# Altium PCB Microcontroller_PCB.PcbDoc
Units mm, origin at the board's own origin, x right, y up, seen from the top; angles counter-clockwise.
Board outline 73.8 x 52.5 mm, 2 copper layers (Top Layer, Bottom Layer); 48 components, 46 nets, 212 pads, 10 vias.
Unrouted connection lines stored in the file: 98.
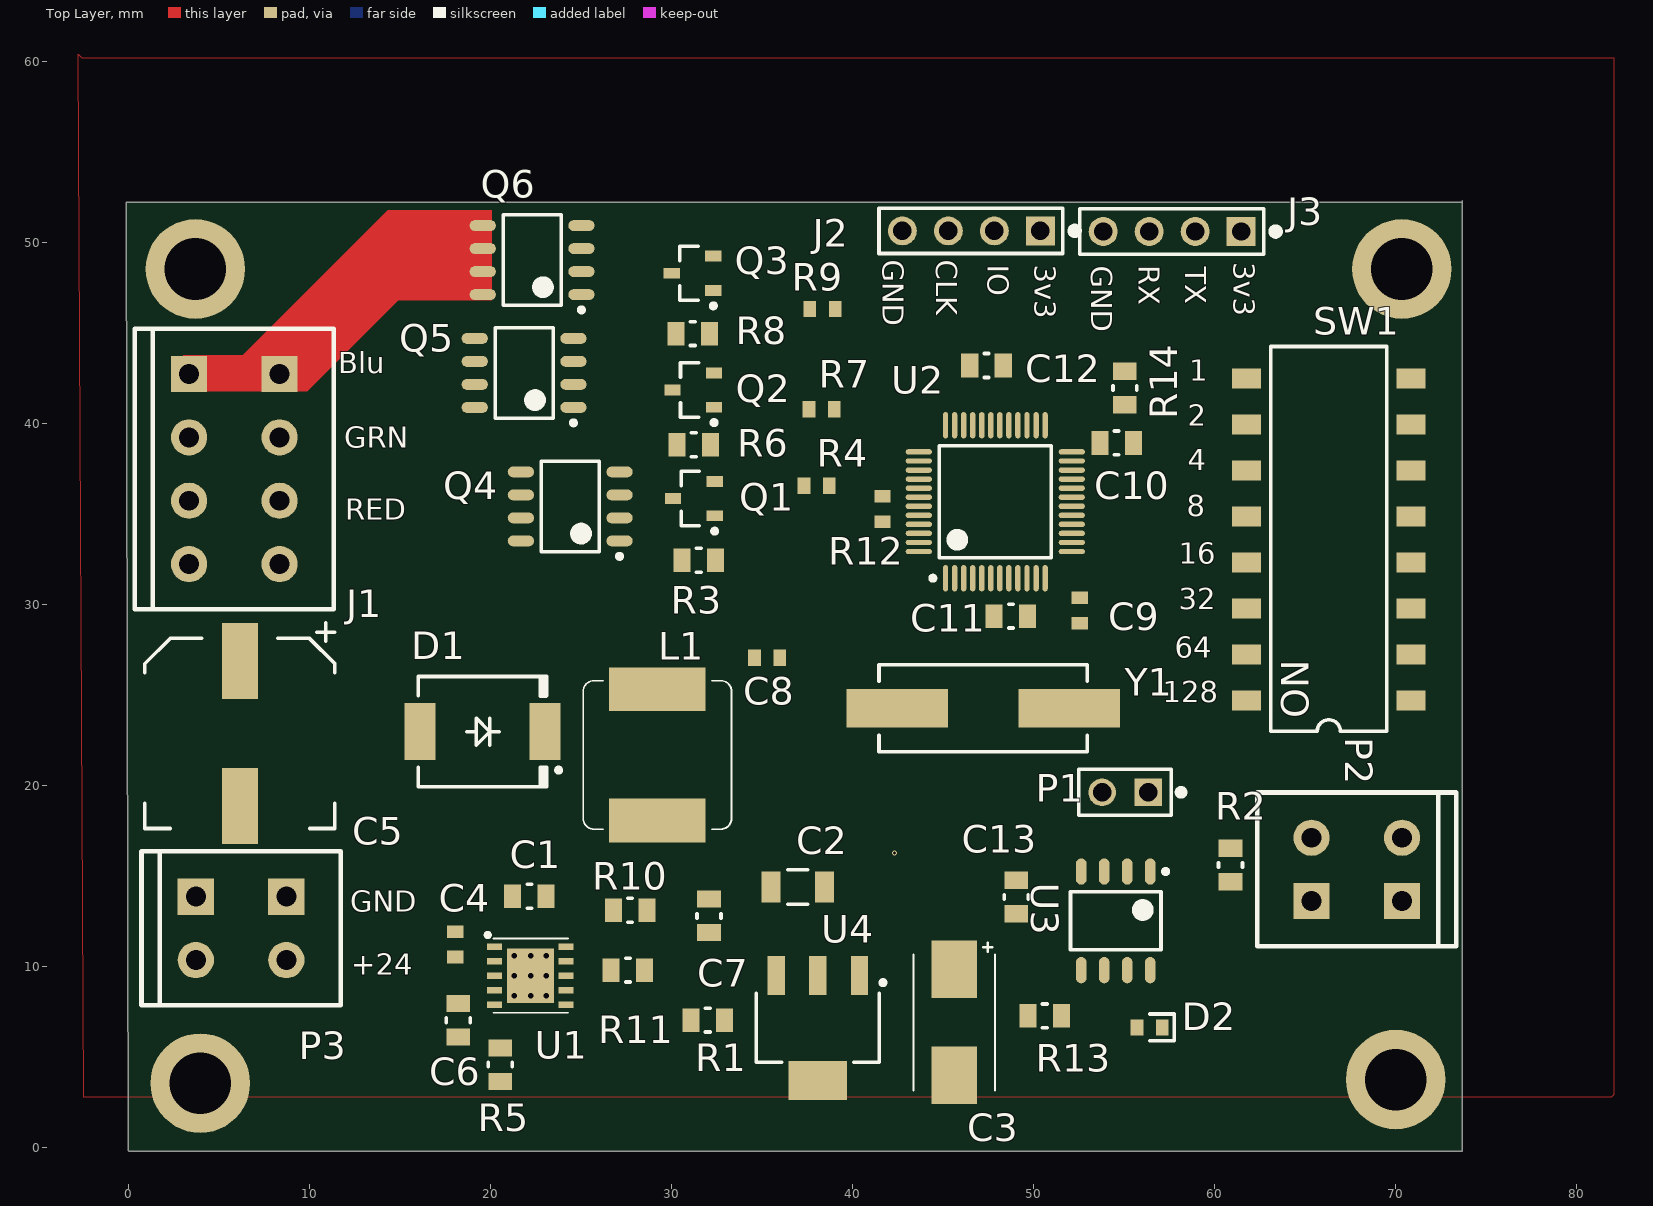
[diagram p0: Top Layer view]
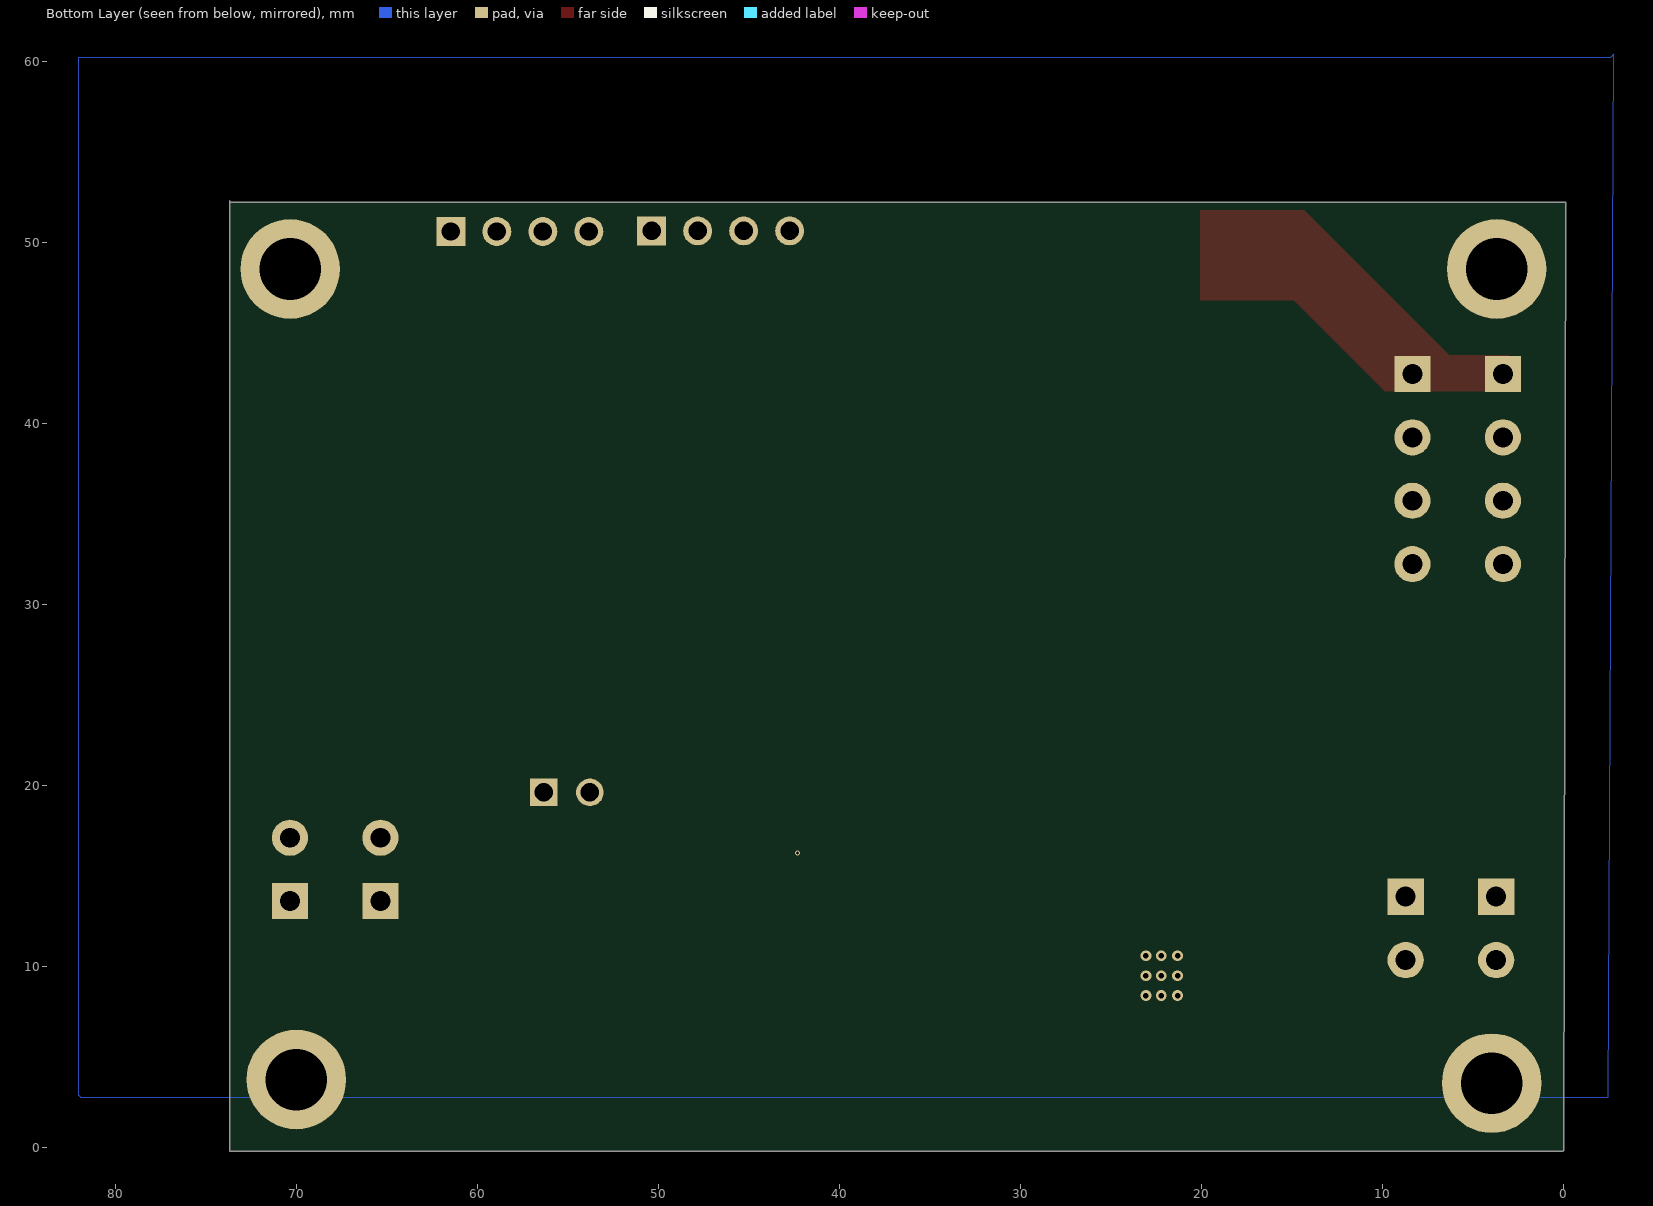
[diagram p1: Bottom Layer view, seen from below]

## Layer stack, top to bottom
Top Solder: solder mask 0.0102, Solder Resist, Dk 3.5
Top Layer: signal copper 0.0356
Dielectric 1: dielectric 0.32, FR-4, Dk 4.8
Bottom Layer: signal copper 0.0356
Bottom Solder: solder mask 0.0102, Solder Resist, Dk 3.5

## Board outline
-0.11,52.23 73.615,52.23 73.685,52.3 73.685,-0.195 0.04,-0.195 0,-0.155

## Design rules (kind name [scope] priority, off if disabled: settings)
Clearance [All] p1: gap=0.25 ignorepadtopadclearanceinfootprint=FALSE except(0: Arc-Hole Track-Hole SMDPad-Text SMDPad-Hole THPad-Hole Via-Hole Fill-Hole Poly-Hole Region-Hole Text-Hole; 0.2: Arc-Arc Arc-Track Arc-SMDPad Arc-THPad Arc-Via Track-Track Track-SMDPad Track-THPad Track-Via SMDPad-SMDPad SMDPad-THPad SMDPad-Via THPad-THPad THPad-Via Via-Via; 0.254: Arc-Text Track-Text THPad-Text Via-Text Fill-Text Poly-Text Region-Text Text-Text)
HoleSize [All] p1: absolutevalues=TRUE maxlimit=6 minlimit=0.2 maxpercent=80.000 minpercent=20.000
PolygonConnect [All] p1: connectstyle=Relief reliefconductorwidth=0.254 reliefentries=4 polygonreliefangle="90 Angle" airgapwidth=0.254
RoutingVias [All] p1: holewidth=0.17 width=0.27 viastyle="Through Hole" minholewidth=0.15 minwidth=0.25 maxholewidth=0.2 maxwidth=0.45
SMDNeckDown [All] p1: percent=60.000
SolderMaskExpansion [All] p1: expansion=0.102 istentingtop=FALSE
Width [All] p1: maxlimit=25 minlimit=0.15 preferedwidth=0.25 minimp=50.000000 maximp=50.000000 favimp=50.000000
29 further rules are at their usual default settings.

## Components (designator, comment, footprint, x,y, rotation, side; value= is the part's Value field where it differs from the comment)
C1 "0.10uF" chip_0805 22.15,13.9 r180 top
C2 "10uF" chip_1206 36.975,14.41 r180 top
C3 "100uF" chip_2917_AVX_TAJD 45.62,6.93 r270 top
C4 "2.2uF" chip_0603 18.055,11.24 r90 top
C5 "47uF" CP_NICHICON_UUX_10x10 6.16,22.885 r0 top
C6 "2700pF" chip_0805 18.215,7.05 r270 top
C7 "820pF" chip_0805 32.07,12.81 r270 top
C8 "18pF" chip_0603 35.285,27.075 r0 top
C9 "18pF" chip_0603 52.545,29.675 r90 top
C10 "0.10uF" chip_0805 54.585,38.93 r180 top
C11 "0.10uF" chip_0805 48.745,29.37 r180 top
C12 "0.10uF" chip_0805 47.395,43.21 r180 top
C13 "0.10uF" chip_0805 49.035,13.855 r270 top
D1 "700mV" do-214ab 19.565,22.985 r180 top
D2 "2.65V" chip_0603_LED 56.41,6.64 r180 top
J1 "conn-4x1_0" TERM_3.50MM_4x1_0 8.355,42.74 r270 top
J2 "conn-4x1_0" HDDR_4x1_0 46.56,50.645 r180 top
J3 "conn-4x1_0" HDDR_4x1_0 57.655,50.61 r180 top
L1 "ind_1" VISHAY_IHLP3232DZ 29.22,21.7 r90 top
P1 "conn-2x1_0" HDDR_2x1_0 55.045,19.635 r180 top
P2 "conn-2x1_0" TERM_3.50MM_2x1_0 70.35,13.625 r90 top
P3 "conn-2x1_0" TERM_3.50MM_2x1_0 3.725,13.87 r270 top
Q1 "MMBT3904LT1G" SOT-23-3_1 31.235,35.86 r180 top
Q2 "MMBT3904LT1G" SOT-23-3_1 31.2,41.855 r180 top
Q3 "MMBT3904LT1G" SOT-23-3_1 31.16,48.305 r180 top
Q4 "FDS5351" SO-8 24.405,35.425 r180 top
Q5 "FDS5351" SO-8 21.86,42.8 r180 top
Q6 "FDS5351" SO-8 22.3,49.035 r180 top
R1 "60.4k" chip_0805 32.005,7.055 r180 top
R2 "120" chip_0805 60.875,15.625 r90 top
R3 "1k" chip_0805 31.5,32.45 r180 top
R4 "3.3k" chip_0603 38.02,36.56 r0 top
R5 "174k" chip_0805 20.545,4.595 r270 top
R6 "1k" chip_0805 31.23,38.84 r180 top
R7 "3.3k" chip_0603 38.29,40.79 r0 top
R8 "1k" chip_0805 31.17,44.975 r180 top
R9 "3.3k" chip_0603 38.34,46.325 r0 top
R10 "23.7k" chip_0805 27.715,13.125 r0 top
R11 "11.5k" chip_0805 27.59,9.815 r0 top
R12 "1.1k" chip_0603 41.655,35.28 r270 top
R13 "665" chip_0805 50.62,7.285 r180 top
R14 "665" chip_0805 55.045,41.965 r90 top (schematic designator R?)
SW1 "DIP_SW_8" A6S-8104-H 70.755,24.71 r180 top (schematic designator SW?)
U1 "TPS54561" WSON-10_0 22.225,9.505 r0 top
U2 "STM32F103C8" LQFP48_0 47.885,35.685 r90 top
U3 "SN65HVD232" SO-8 54.535,12.535 r270 top
U4 "LM1117" sot-223-4 38.08,6.625 r270 top
Y1 "osc_xtal_2p_0" ABLS_AT49_OSC 47.215,24.28 r0 top

## Footprints (in the part's own frame and the unit in brackets; to place one, negate y for a bottom-side part, rotate by r counter-clockwise, add the part's x,y. Pads: shape width x height; smd on the part's side, far side on the other; paste and mask are expansions set on the pad)
A6S-8104-H [mm]
  rect 1.6x1.1 smd: 1(-0.1,0) 2(-0.1,-2.54) 3(-0.1,-5.08) 4(-0.1,-7.62) 5(-0.1,-10.16) 6(-0.1,-12.7) 7(-0.1,-15.24) 8(-0.1,-17.78) 9(9,-17.78) 10(9,-15.24) 11(9,-12.7) 12(9,-10.16) 13(9,-7.62) 14(9,-5.08) 15(9,-2.54) 16(9,0)
  silkscreen extent 1.25,-19.55 7.65,1.7, body extent -0.45,-19.53 9.35,1.73, height 4.4
ABLS_AT49_OSC [mil] "ABLS Crystal Oscillator"
  rect 220x83 smd: 1(-187.01,0) 2(186.99,0)
  silkscreen extent -226,-94 226,94, body extent -224,-94 224,94, height 157
chip_0603 [mm]
  rect 0.7x0.9 smd: 1(-0.7,0) 2(0.7,0)
  body extent -0.85,-0.45 0.85,0.45, height 0.6
chip_0603_LED [mm]
  rect 0.7x0.9 smd: 1(-0.7,0) 2(0.7,0)
  silkscreen extent -1.35,-0.75 0,0.72, body extent -0.85,-0.45 0.85,0.45, height 0.6
chip_0805 [mm]
  rect 0.95x1.3 smd: 1(-0.925,0) 2(0.925,0)
  silkscreen extent -0.13,-0.66 0.13,0.66, body extent -1.05,-0.65 1.05,0.65, height 0.6
chip_1206 [mm]
  rect 1.05x1.7 smd: 1(-1.475,0) 2(1.475,0)
  silkscreen extent -0.55,-0.95 0.55,0.95, body extent -1.65,-0.85 1.65,0.85, height 0.6
chip_2917_AVX_TAJD [mm] "2917 footprint for AVX TAJD"
  rect 3.175x2.5 smd: 1(-2.921,0) 2(2.921,0)
  silkscreen extent -4.4,-2.25 3.75,2.25, body extent -3.75,-2.25 3.75,2.25, height 3.15
CP_NICHICON_UUX_10x10 [mm] "Nichicon UUX Series 10x10 SMD capacitor"
  rect 2x4.2 smd: 1(0,4) 2(0,-4)
  silkscreen extent -5.25,-5.25 5.25,6.1, body extent -5.24,-5.6 5.25,5.6, height 10.54
do-214ab [mm] "DO-214AB, SMC"
  rect 1.7x3.15 smd: 1(-3.45,0) 2(3.45,0)
  silkscreen extent -4.33,-3.05 3.55,3.05, body extent -3.56,-3.05 3.55,3.05, height 2.41
HDDR_2x1_0 [mil] "0.1\" Header 2x1"
  rect 60x60 hole 40: 1(-50.39,0)
  round 60 hole 40: 2(49.61,0)
  silkscreen extent -128,-50 100,50, body extent -100,-50 100,50, height 336
HDDR_4x1_0 [mm]
  rect 1.6x1.6 hole 1.016: 1(-3.81,0)
  round 1.6 hole 1.016: 2(-1.27,0) 3(1.27,0) 4(3.81,0)
  silkscreen extent -5.91,-1.25 5.1,1.25, body extent -5.08,-1.27 5.08,1.27, height 8.54
LQFP48_0 [mm] "LQFP48, 7.00x7.00mm, 0.50mm"
  oval 1.45x0.3 smd: 1(-4.225,2.75) 2(-4.225,2.25) 3(-4.225,1.75) 4(-4.225,1.25) 5(-4.225,0.75) 6(-4.225,0.25) 7(-4.225,-0.25) 8(-4.225,-0.75) 9(-4.225,-1.25) 10(-4.225,-1.75) 11(-4.225,-2.25) 12(-4.225,-2.75) 25(4.225,-2.75) 26(4.225,-2.25) 27(4.225,-1.75) 28(4.225,-1.25) 29(4.225,-0.75) 30(4.225,-0.25) 31(4.225,0.25) 32(4.225,0.75) 33(4.225,1.25) 34(4.225,1.75) 35(4.225,2.25) 36(4.225,2.75)
  oval 0.3x1.45 smd: 13(-2.75,-4.225) 14(-2.25,-4.225) 15(-1.75,-4.225) 16(-1.25,-4.225) 17(-0.75,-4.225) 18(-0.25,-4.225) 19(0.25,-4.225) 20(0.75,-4.225) 21(1.25,-4.225) 22(1.75,-4.225) 23(2.25,-4.225) 24(2.75,-4.225) 37(2.75,4.225) 38(2.25,4.225) 39(1.75,4.225) 40(1.25,4.225) 41(0.75,4.225) 42(0.25,4.225) 43(-0.25,4.225) 44(-0.75,4.225) 45(-1.25,4.225) 46(-1.75,4.225) 47(-2.25,4.225) 48(-2.75,4.225)
  silkscreen extent -4.35,-3.1 3.1,3.57, body extent -3.5,-3.5 3.5,3.5, height 1.6
SO-8 [mm] "SO-8 Package"
  oval 1.45x0.6 smd: 1(-2.725,1.905) 2(-2.725,0.635) 3(-2.725,-0.635) 4(-2.725,-1.905) 5(2.725,-1.905) 6(2.725,-0.635) 7(2.725,0.635) 8(2.725,1.905)
  silkscreen extent -2.85,-2.5 1.6,2.88, body extent -3.08,-2.5 3.08,2.5, height 2
SOT-23-3_1 [mm] "SOT-23-3 package"
  rect 0.9x0.6 smd: 1(-1.15,0.95) 2(-1.15,-0.95) 3(1.15,0)
  silkscreen extent -1.28,-1.5 0.7,1.92, body extent -1.42,-1.5 1.42,1.5, height 1.2
sot-223-4 [mm]
  rect 2.15x0.95 smd: 1(-2.9,2.3) 2(-2.9,0) 3(-2.9,-2.3)
  rect 2.15x3.25 smd: 4(2.9,0)
  silkscreen extent -2.62,-3.4 1.9,3.73, body extent -1.9,-3.4 1.9,3.4, height 1.1
TERM_3.50MM_2x1_0 [mm] "Terminal Block, 3.5mm pitch"
  rect 2x2 hole 1.1: 1(0,5) 1(0,0)
  round 2 hole 1.1: 2(3.5,0) 2(3.5,5)
  silkscreen extent -2.5,-3 6,8, body extent -2.5,-3 6,8, height 8.98
TERM_3.50MM_4x1_0 [mm]
  rect 2x2 hole 1.1: 1(0,0) 1(0,-5)
  round 2 hole 1.1: 2(3.5,0) 2(3.5,-5) 3(7,0) 3(7,-5) 4(10.5,0) 4(10.5,-5)
  silkscreen extent -2.5,-8 13,3, body extent -2.5,-8 13,3, height 8.98
VISHAY_IHLP3232DZ [mil] "Inductor, Vishay Dale, IHLP-3232DZ series"
  rect 95x210 smd: 1(-142.52,0) 2(142.52,0)
  silkscreen extent -161,-161 161,161, body extent -161,-161 161,161, height 157
WSON-10_0 [mm]
  rect 0.85x0.35 smd mask+0.07: 1(-2,1.6) 2(-2,0.8) 3(-2,0) 4(-2,-0.8) 5(-2,-1.6) 6(1.95,-1.6) 7(1.95,-0.8) 8(1.95,0) 9(1.95,0.8) 10(1.95,1.6)
  rect 2.6x3 smd mask+0.07: 11(-0.025,0)
  silkscreen extent -2.47,-2.05 2.05,2.35, body extent -2.05,-2.05 2.05,2.05, height 0.8

## Part data
C1 C10 C11 C12 C13: library part CAP-00069, "CAP, 0.10uF, 10%, 16V, X7R, 0805", Manufacturer=Murata, Manufacturer PN=GRM219R71C104KA01D, Tolerance=10%, Voltage Rating=16V, Capacitance=0.10uF, Part Number=CAP-00069, Type=X7R
C2: library part CAP-00539, "CAP, 10uF, ±10%, 25V, X7R, 1206", Manufacturer=Samsung, Manufacturer PN=CL31B106KAHNNNE, Tolerance=±10%, Voltage Rating=25V, Capacitance=10uF, Part Number=CAP-00539, Type=X7R
C3: library part CAP-00550, "CAP, 100uF, ±10%, 16V, Tantalum, 2917", Manufacturer=AVX, Manufacturer PN=TAJD107K016RNJ, Tolerance=±10%, Voltage Rating=16V, Capacitance=100uF, Cost=$0.94, Part Number=CAP-00550, Type=Tantalum
C4: library part CAP-00512, "CAP, 2.2uF, ±10%, 10V, X7R, 0603", Manufacturer=Murata, Manufacturer PN=GRM188R71A225KE15D, Tolerance=±10%, Voltage Rating=10V, Capacitance=2.2uF, Part Number=CAP-00512, Type=X7R
C5: library part CAP-00567, "CAP, 47uF, ±20%, 100V, Al, SMD", Manufacturer=Nichicon, Manufacturer PN=UUX2A470MNL1GS, Tolerance=±20%, Voltage Rating=100V, Capacitance=47uF, Cost=$0.74, Part Number=CAP-00567, Type=Al
C6: library part CAP-00024, "CAP, 2700pF, 10%, 50V, X7R, 0805", Manufacturer=Murata, Manufacturer PN=GRM216R71H272KA01D, Tolerance=10%, Voltage Rating=50V, Capacitance=2700pF, Part Number=CAP-00024, Type=X7R
C7: library part CAP-00008, "CAP, 820pF, 10%, 50V, X7R, 0805", Manufacturer=Murata, Manufacturer PN=GRM216R71H821KA01D, Tolerance=10%, Voltage Rating=50V, Capacitance=820pF, Part Number=CAP-00008, Type=X7R
C8 C9: library part CAP-00409, "CAP, 18pF, ±2%, 50V, C0G, 0603", Manufacturer=Murata, Manufacturer PN=GRM1885C1H180GA01D, Tolerance=±2%, Voltage Rating=50V, Capacitance=18pF, Part Number=CAP-00409, Type=C0G
D1: library part DIO-00048, "Dio, Schottky, 5A, 700mV, 60V, SMC", Current Rating=5A, Manufacturer="Diodes Incorporated", Manufacturer PN=B560C-13-F, Reverse Breakdown Voltage=60V, Cost=0.5, Forward Voltage=700mV, Part Number=DIO-00048, Type=Schottky
D2: library part DIO-00050, "LED, Green, 0603, Low current, HELI2 Series", Current Rating=30mA, Manufacturer=Kingbright, Manufacturer PN=APT1608LZGCK, Power Rating=120mW, Reverse Breakdown Voltage=5V, Cost=0.58, Forward Voltage=2.65V, Part Number=DIO-00050, Type=LED
J1: library part CONN-00024, "Term Blk, 4 Pos, 8A, 3.5mm Pitch, Screwless", Current=8, Manufacturer="Phoenix Contact", Manufacturer PN=1861959, Cost=1.67, Levels=1, Part Number=CONN-00024, Positions per level=4, Type="Terminal Block", Weight=2.3
J2 J3: library part CONN-00029, "Header 4x1, 0.1\"", Levels=1, Part Number=CONN-00029, Positions per level=4, Type=Header
L1: library part MAG-00106, "Ind, 10uH, 20%, 5.2A (9A sat.), 0.0599 Ohm", Current Rating=5.2A, Inductance=10uH, Manufacturer="Vishay Dale", Manufacturer PN=IHLP3232DZER100M01, Tolerance=20%, Cost=1.65, DCR=59.9mOhm, Part Number=MAG-00106
P1: library part CONN-00055, "Header, 2x1, 0.1\"", Manufacturer=Samtec, Manufacturer PN=TSW-102-07-F-S, Cost=0.2, Levels=1, Part Number=CONN-00055, Positions per level=2, Type=Header
P2 P3: library part CONN-00023, "Term Blk, 2 Pos, 8A, 3.5mm Pitch, Screwless", Current=8, Manufacturer="Phoenix Contact", Manufacturer PN=1861933, Cost=0.79, Levels=1, Part Number=CONN-00023, Positions per level=2, Type="Terminal Block", Weight=1.13
Q1 Q2 Q3: library part XSTR-00037, "XSTR, NPN, 200mA, 40V, Vce 0.3V, SOT-23-3", Manufacturer="ON Semi", Max Current=200mA, Max Power=300mW, Max Voltage=40V, Cost=0.12, Manufacturer PN=MMBT3904LT1G, Part Number=XSTR-00037, Type=NPN, Vgs/Vce=0.3V
Q4 Q5 Q6: library part XSTR-00034, "XSTR NFET, 6.1A, 60V, 5W, SOIC-8", Manufacturer="ON Semi", Max Current=6.1A, Max Power=5W, Max Voltage=60V, Cost=0.8, Manufacturer PN=FDS5351, Part Number=XSTR-00034, Type=NFET, Vgs/Vce=2.0V
R1: library part RES-00531, "RES SMD 60.4K OHM 1% 1/8W 0805", Manufacturer="Rohm Semiconductor", Manufacturer PN=KTR10EZPF6042, Power Rating=0.125W, Tolerance=1%, Part Number=RES-00531, Resistance=60.4k
R2: library part RES-00183, "RES SMD 120 OHM 1% 1/8W 0805", Manufacturer="Rohm Semiconductor", Manufacturer PN=KTR10EZPF1200, Power Rating=0.125W, Tolerance=1%, Part Number=RES-00183, Resistance=120
R3 R6 R8: library part RES-00361, "RES SMD 1K OHM 1% 1/8W 0805", Manufacturer="Rohm Semiconductor", Manufacturer PN=KTR10EZPF1001, Power Rating=0.125W, Tolerance=1%, Part Number=RES-00361, Resistance=1k
R4 R7 R9: library part RES-00419, "RES SMD 3.3K OHM 1% 1/4W 0603", Manufacturer=Panasonic, Manufacturer PN=ERJ-PA3F3301V, Power Rating=0.25W, Tolerance=1%, Part Number=RES-00419, Resistance=3.3k
R5: library part RES-00350, "RES SMD 174K OHM 1% 1/8W 0805", Manufacturer="Rohm Semiconductor", Manufacturer PN=KTR10EZPF1743, Power Rating=0.125W, Tolerance=1%, Part Number=RES-00350, Resistance=174k
R10: library part RES-00392, "RES SMD 23.7K OHM 1% 1/8W 0805", Manufacturer="Rohm Semiconductor", Manufacturer PN=KTR10EZPF2372, Power Rating=0.125W, Tolerance=1%, Part Number=RES-00392, Resistance=23.7k
R11: library part RES-00309, "RES SMD 11.5K OHM 1% 1/8W 0805", Manufacturer="Rohm Semiconductor", Manufacturer PN=KTR10EZPF1152, Power Rating=0.125W, Tolerance=1%, Part Number=RES-00309, Resistance=11.5k
R12: library part RES-00264, "RES SMD 1.1K OHM 1% 1/4W 0603", Manufacturer=Panasonic, Manufacturer PN=ERJ-PA3F1101V, Power Rating=0.25W, Tolerance=1%, Part Number=RES-00264, Resistance=1.1k
R13 R14: library part RES-00248, "RES SMD 665 OHM 1% 1/8W 0805", Manufacturer="Rohm Semiconductor", Manufacturer PN=KTR10EZPF6650, Power Rating=0.125W, Tolerance=1%, Part Number=RES-00248, Resistance=665
SW1: library part MISC-00045, "DIP Switch, 8 Switches, SMD, 25mA, 24V", Manufacturer=Omron, Manufacturer PN=A6S-8104-H, Cost=2.85, Part Number=MISC-00045
U1: library part PWREG-00033, "REG, SW Buck Adj, 5A, 4.5-60V, 2.5MHz, TPS54561", Frequency=100kHz-2.5MHz, Manufacturer=TI, Manufacturer PN=TPS54561DPRR, Max Current=5A, Voltage Range In=4.5-60V, Voltage Range Out=0.8-58.8V, Cost=5.52, Fixed/Adj=Adj, Part Number=PWREG-00033, Reg Type="SW Buck"
U2: library part UCTRL-00008, "STM32 M3, LQFP-48", Manufacturer=ST, Manufacturer PN=STM32F103C8, Part Number=UCTRL-00008
U3: library part IFACE-00008, "CANbus Transceiver, Single channel, SN65HVD232", Manufacturer=TI, Manufacturer PN=SN65HVD232DR, Cost=2.01, Part Number=IFACE-00008
U4: library part PWREG-00018, "REG, Linear, Fixed 3V3, 800mA, SOT-223", Manufacturer=TI, Manufacturer PN=LM1117MPX-3.3/NOPB, Max Current=800mA, Voltage Range In="4.5 - 15V", Voltage Range Out=3.3V, Cost=1.14, Fixed/Adj=Fixed, Part Number=PWREG-00018, Reg Type=Linear
Y1: library part OSC-00002, "XTAL, 8MHz, 18pF, 20ppm", Frequency=8.000M, Load Capacitance=18pF, Manufacturer=Abracon, Manufacturer PN=ABLS-8.000MHZ-B2-T, Tolerance=20ppm, ESR=80, Part Number=OSC-00002, Stability=50ppm

## Free pads (board coordinates)
  round 5.5 hole 3.4: 1(3.7,48.54) 2(70.34,48.54) 3(70,3.77) 4(3.97,3.57)

## Via types
v1: diameter 0.6, hole 0.3, Top Layer to Bottom Layer, 9 vias
v2: diameter 0.27, hole 0.17, Top Layer to Bottom Layer, 1 vias

## Nets (pads, with @x,y where several pads share a name; then routed paths per layer and width w, separated by ;. In a path a pad name is that pad's centre, name@x,y a point inside that pad or via, vN(x,y) a via of type N, cw(c..) or ccw(c..) an arc to the next point about the centre after c; other vN are vias at no path point)
+12: C2.1 C5.1 J1.4 L1.2 R1.1 R3.1 R6.1 R8.1 U4.3
+24: C4.1 P3.2 U1.2
CAN_ID_1: SW1.9 U2.18
CAN_ID_2: SW1.10 U2.19
CAN_ID_4: SW1.11 U2.20
CAN_ID_8: SW1.12 U2.39
CAN_ID_16: SW1.13 U2.40
CAN_ID_32: SW1.14 U2.41
CAN_ID_64: SW1.15 U2.42
CAN_ID_128: SW1.16 U2.43
CANRX: U2.33 U3.4
CANTX: U2.32 U3.1
GND: C2.2 C3.2 C4.2 C5.2 C6.2 C7.2 C8.1 C9.2 C10.1 C11.2 C12.1 C13.1 D1.2 D2.1 J2.4 J3.4 P3.1 Q1.2 Q2.2 Q3.2 Q4.1 Q4.2 Q4.3 Q5.1 Q5.2 Q5.3 Q6.1 Q6.2 Q6.3 R5.2 R11.2 R12.2 U1.8 U1.11 U2.8 U2.23 U2.35 U2.47 U3.2 U4.1
  other v1: 21.325,8.405 22.225,8.405 23.075,8.405 21.325,9.505 22.225,9.505 23.075,9.505 21.325,10.605 22.225,10.605 23.075,10.605
LED_BLUE: J1.1 Q6.5 Q6.6 Q6.7 Q6.8
LED_GREEN: J1.2 Q5.5 Q5.6 Q5.7 Q5.8
LED_RED: J1.3 Q4.5 Q4.6 Q4.7 Q4.8
NetC1_1: C1.1 D1.1 L1.1 U1.9
NetC1_2: C1.2 U1.1
NetC6_1: C6.1 U1.4
NetC7_1: C7.1 R10.2
NetC8_2: C8.2 U2.5 Y1.1
NetC9_1: C9.1 U2.6 Y1.2
NetD2_2: D2.2 R13.1
NetP1_1: P1.1 P2.1 U3.7
NetP1_2: P1.2 R2.1
NetP2_2: P2.2 R2.2 U3.6
NetQ1_1: Q1.1 R4.1
NetQ1_3: Q1.3 Q4.4 R3.2
NetQ2_1: Q2.1 R7.1
NetQ2_3: Q2.3 Q5.4 R6.2
NetQ3_1: Q3.1 R9.1
NetQ3_3: Q3.3 Q6.4 R8.2
NetR1_2: R1.2 R11.1 U1.6
NetR5_1: R5.1 U1.5
NetR10_1: R10.1 U1.7
NetR12_1: R12.1 U2.44
NetR?_1: R14.1 SW1.1 SW1.2 SW1.3 SW1.4 SW1.5 SW1.6 SW1.7 SW1.8
PA0-WKUP: R4.2 U2.10
PA1: R7.2 U2.11
PA2: R9.2 U2.12
PA4: R13.2 U2.14
PA13: J2.2 U2.34
PA14: J2.3 U2.37
USART1_RX: J3.3 U2.31
USART1_TX: J3.2 U2.30
VCC: C3.1 C10.2 C11.1 C12.2 C13.2 J2.1 J3.1 R14.2 U2.1 U2.9 U2.24 U2.36 U2.48 U3.3 U4.2 U4.4
pads on no net: U1.3 U1.10 U2.2 U2.3 U2.4 U2.7 U2.13 U2.15 U2.16 U2.17 U2.21 U2.22 U2.25 U2.26 U2.27 U2.28 U2.29 U2.38 U2.45 U2.46 U3.5 U3.8
copper on no net:
  other v2: 42.32,16.285

## Polygon pours and split planes (outlines as drawn)
GND on Bottom Layer "Bottom - GND" (solid, shelved, pour order 6): -2.77,60.41 -2.58,60.22 82.045,60.22 82.045,2.92 81.915,2.79 -2.455,2.79
GND on Top Layer "Top - GND" (solid, shelved, pour order 7): -2.77,60.41 -2.58,60.22 82.045,60.22 82.045,2.92 81.915,2.79 -2.455,2.79

## Other copper
Top Layer:
  region net LED_BLUE: 3.02,41.78 9.87,41.78 14.9,46.81 20.07,46.81 20.07,51.78 14.32,51.78 6.32,43.78 3.02,43.78
Multi-Layer:
  pour cut-out: 2.395,41.715 2.505,41.825 12.275,41.825

## Silkscreen, mask and mechanical layers (free items; w line width, h text height)
Top Overlay:
  text "GND" at 41.281,49.039 h2 r270
  text "CLK" at 44.231,49.053 h2 r270
  text "3v3" at 60.66,48.905 h2 r270
  text "IO" at 47.076,48.786 h2 r270
  text "3v3" at 49.676,48.776 h2 r270
  text "RX" at 55.43,48.745 h2 r270
  text "GND" at 52.8,48.729 h2 r270
  text "TX" at 57.995,48.67 h2 r270
  text "Blu" at 11.58,42.395 h2
  text "1" at 58.605,41.975 h2
  text "2" at 58.52,39.495 h2
  text "GRN" at 11.919,38.29 h2
  text "4" at 58.52,37.035 h2
  text "8" at 58.465,34.49 h2
  text "RED" at 11.968,34.3 h2
  text "16" at 58.014,31.885 h2
  text "32" at 58.015,29.36 h2
  text "64" at 57.799,26.685 h2
  text "128" at 57.14,24.215 h2
  text "GND" at 12.246,12.65 h2
  text "+24" at 12.313,9.185 h2
Mechanical 1:
  lines w0.254: 73.545,-0.04 -0.035,-0.04 -0.035,52.245 73.65,52.245 73.65,-0.045

## Text inside footprints (layer, text, board x,y; h text height)
SW1: Top Overlay "ON" at 65.201,23.714 h1.52 r90